# EAGLE board GS - Edge (EAGLE 9.7.0)

Size 250.65 x 63.55 mm. Coordinates in mm from the lower left corner, seen from the top.
Outline: 0,0 250.65,0 250.65,63.55 0,63.55 0,0
Copper layers (1*16): Top 0.035mm / dielectric 1.5mm / Bottom 0.035mm
Design rules "default": minimum track width 6mil, minimum drill 0.35mm, track to track 6mil, track to pad 6mil, pad to pad 6mil, via to via 6mil, smd to smd 6mil, copper to edge 40mil, drill to drill 6mil, minimum pad ring 10mil, minimum via ring 8mil, stop-mask expansion 4mil, vias tented up to drill 0mil, thermal gap 10mil

## Footprints (pad centres in the part's own frame; a part is rotated, then mirrored left to right if it is on the bottom)
PIEZO = drill 1 pad 1.6: 1 -3.5,0; 2 3.5,0
HA-06-SM065 = drill 1 pad 1.676: 1 -2.54,-2.54; 2 0,2.54; 3 2.54,-2.54
ARDUINO-UNO-R3-SHIELD = drill 1.016 pad 1.88: 3.3V 24.13,-2.54; 5V 24.13,0; A0 24.13,12.7; A1 24.13,15.24; A2 24.13,17.78; A3 24.13,20.32; A4 24.13,22.86; A5 24.13,25.4; AREF -24.13,-13.97; D2 -24.13,20.32; D3 -24.13,17.78; D4 -24.13,15.24; D5 -24.13,12.7; D6 -24.13,10.16; D7 -24.13,7.62; D8 -24.13,3.81; D9 -24.13,1.27; D10 -24.13,-1.27; D11 -24.13,-3.81; D12 -24.13,-6.35; D13 -24.13,-8.89; GND@0 24.13,2.54; GND@1 24.13,5.08; GND@2 -24.13,-11.43; IOREF 24.13,-7.62; NC 24.13,-10.16; RES 24.13,-5.08; RX -24.13,25.4; SCL -24.13,-19.05; SDA -24.13,-16.51; TX -24.13,22.86; VIN 24.13,7.62
LCD-I2C = drill 1.016 long: 1 -19.05,-5.08; 2 -19.05,-7.62; 3 -19.05,-10.16; 4 -19.05,-12.7
TO92 = drill 0.813 octagon: 1 -1.27,0; 2 0,1.905; 3 1.27,0

## Placement (x,y rotation side)
PIEZO1  PIEZO  [PIEZO]  238.92,43.43 0 top
RPOTSENSOR_DE_OXIGÊNIO  10k  [HA-06-SM065]  207.17,15.49 0 top
RPOTSENSOR_DE_PH1  10k  [HA-06-SM065]  191.93,15.49 0 top
RPOTSENSOR_DE_SALINIDADE2  10k  [HA-06-SM065]  222.41,15.49 0 top
U2  ARDUINO-UNO-R3-SHIELD  [ARDUINO-UNO-R3-SHIELD]  47.88,29.84 270 top
U4  LCD-16X2-I2CSUNFOUNDER-IIC  [LCD-I2C]  130.33,56.01 0 top
USENSOR_DE_TEMPERATURA  TMP36GT9Z_TO92  [TO92]  235.11,15.49 0 top

## Library data of the parts
PIEZO1 RPOTSENSOR_DE_OXIGÊNIO RPOTSENSOR_DE_PH1 RPOTSENSOR_DE_SALINIDADE2 U2 U4 USENSOR_DE_TEMPERATURA = Tinkercad

## Nets
U2_5V: RPOTSENSOR_DE_OXIGÊNIO.1 RPOTSENSOR_DE_PH1.1 RPOTSENSOR_DE_SALINIDADE2.1 U2.5V U4.2 USENSOR_DE_TEMPERATURA.3
U2_A0: U2.A0 USENSOR_DE_TEMPERATURA.2
U2_A1: RPOTSENSOR_DE_PH1.2 U2.A1
U2_A2: RPOTSENSOR_DE_OXIGÊNIO.2 U2.A2
U2_A3: RPOTSENSOR_DE_SALINIDADE2.2 U2.A3
U2_A4: U2.A4 U4.3
U2_A5: U2.A5 U4.4
U2_D8: PIEZO1.1 U2.D8
U2_GND: PIEZO1.2 RPOTSENSOR_DE_OXIGÊNIO.3 RPOTSENSOR_DE_PH1.3 RPOTSENSOR_DE_SALINIDADE2.3 U2.GND@0 U2.GND@1 U2.GND@2 U4.1 USENSOR_DE_TEMPERATURA.1

## Tracks (layer width: path | path; a pad name or v marks a point on that pad's centre or on a via)
U2_5V  (5 unrouted)
U2_A0  (1 unrouted)
U2_A1  (1 unrouted)
U2_A2  (1 unrouted)
U2_A3  (1 unrouted)
U2_A4  (1 unrouted)
U2_A5  (1 unrouted)
U2_D8  (1 unrouted)
U2_GND  (8 unrouted)